# Altium PCB A5000_BasicBackplane.PcbDoc
Units mm, origin at the board's own origin, x right, y up, seen from the top; angles counter-clockwise.
Board outline 240.28 x 64.01 mm, 4 copper layers (Top Layer, 5V, Mixed Power, Bottom Layer), stack 1.741 mm thick; 10 components, 60 nets, 390 pads, 75 vias.
Unrouted connection lines stored in the file: 1.
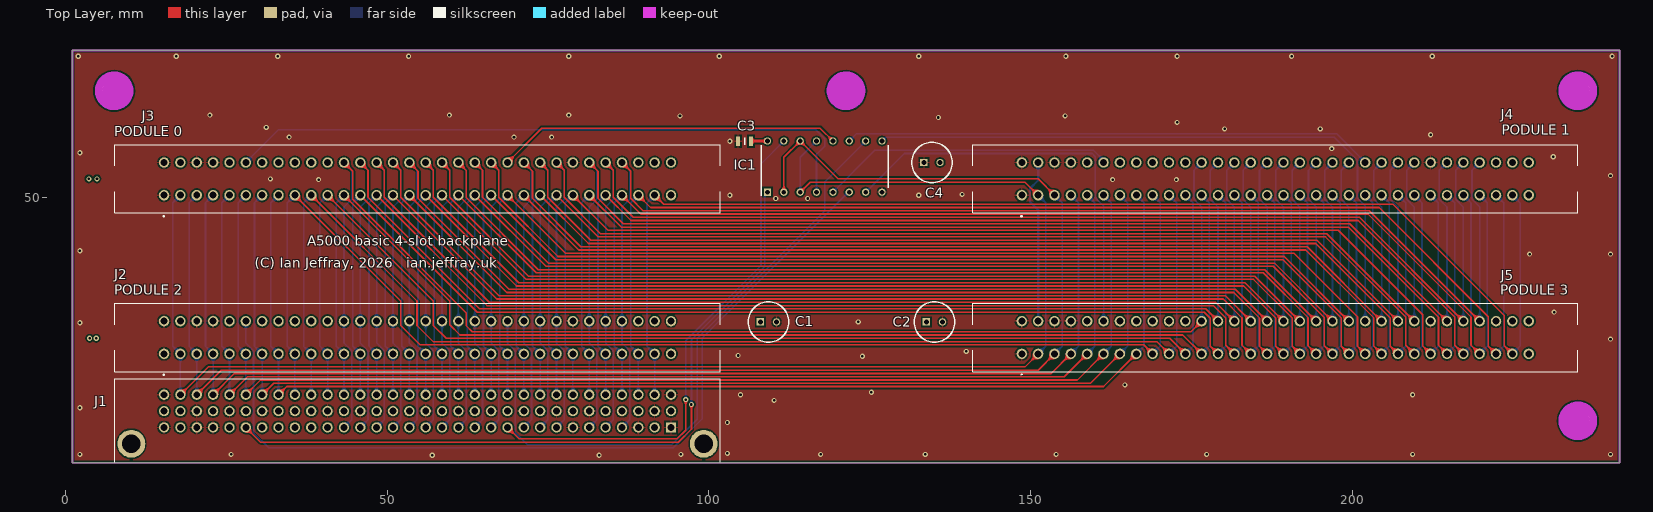
[diagram p0: Top Layer view]
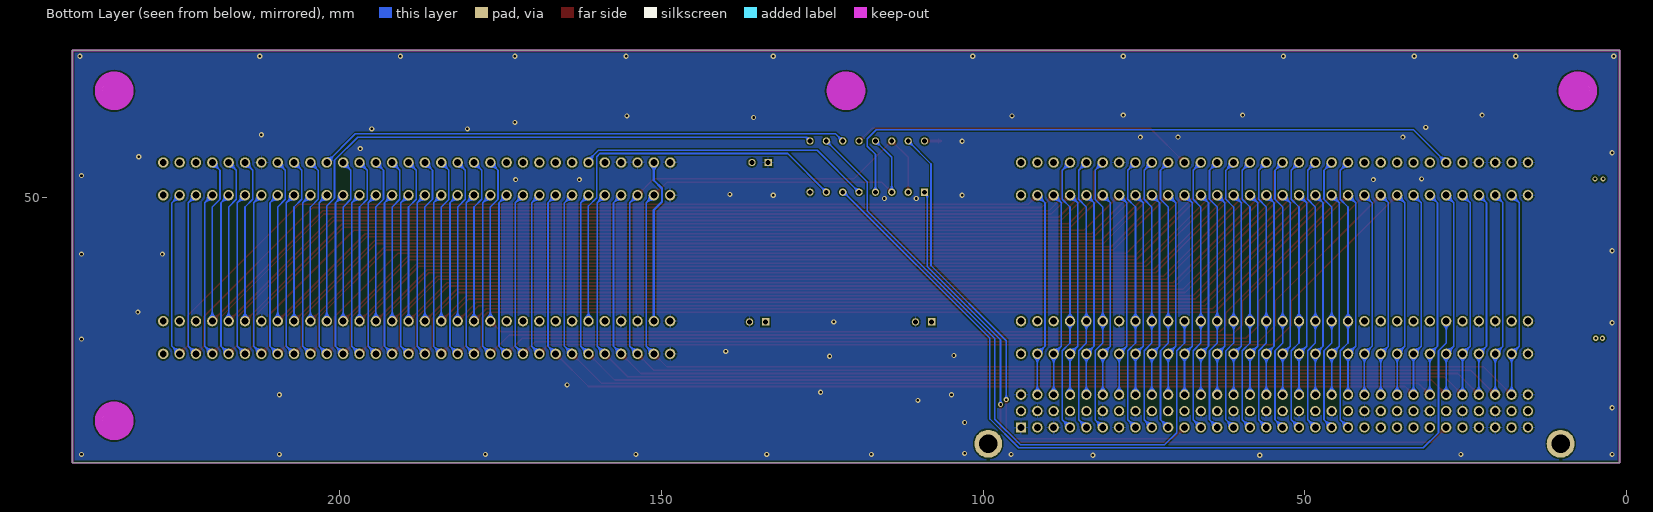
[diagram p1: Bottom Layer view, seen from below]
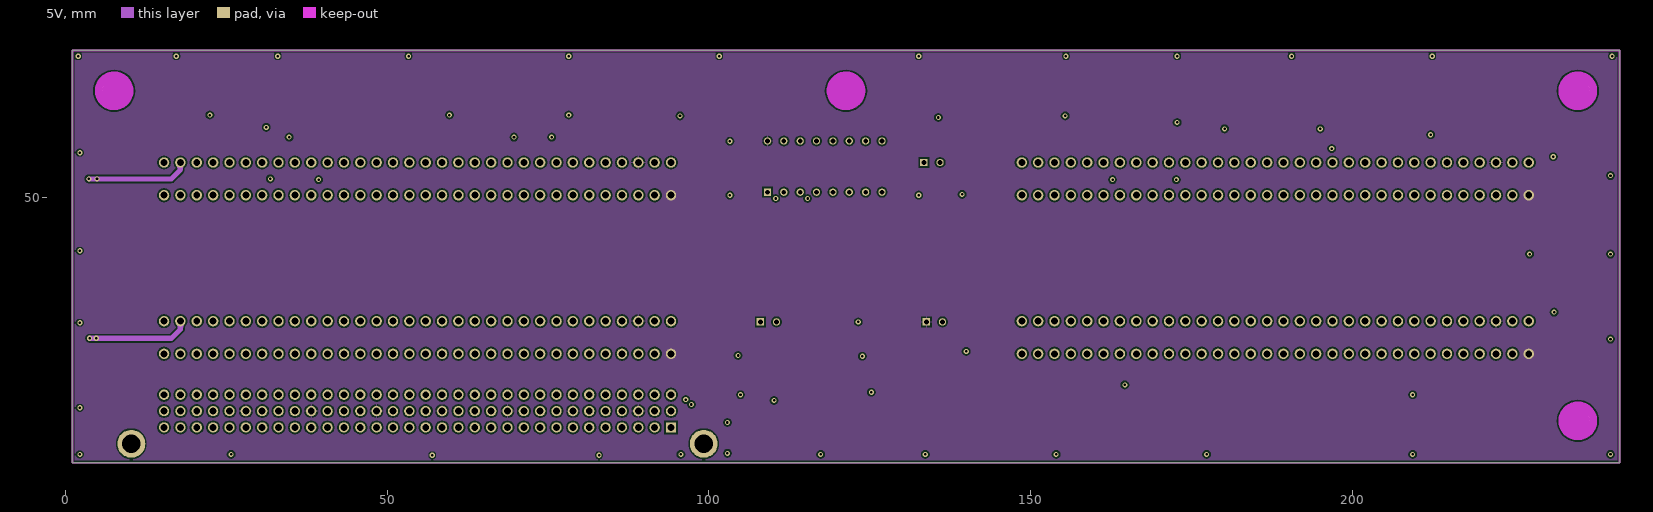
[diagram p2: 5V]
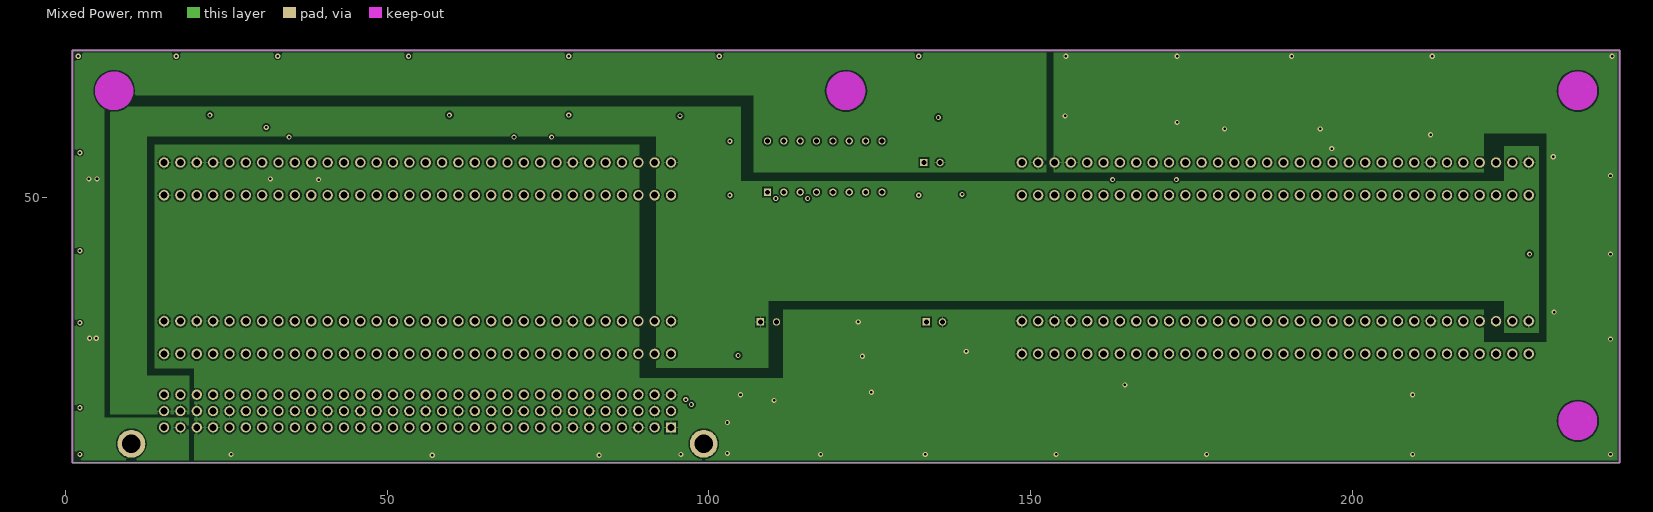
[diagram p3: Mixed Power]
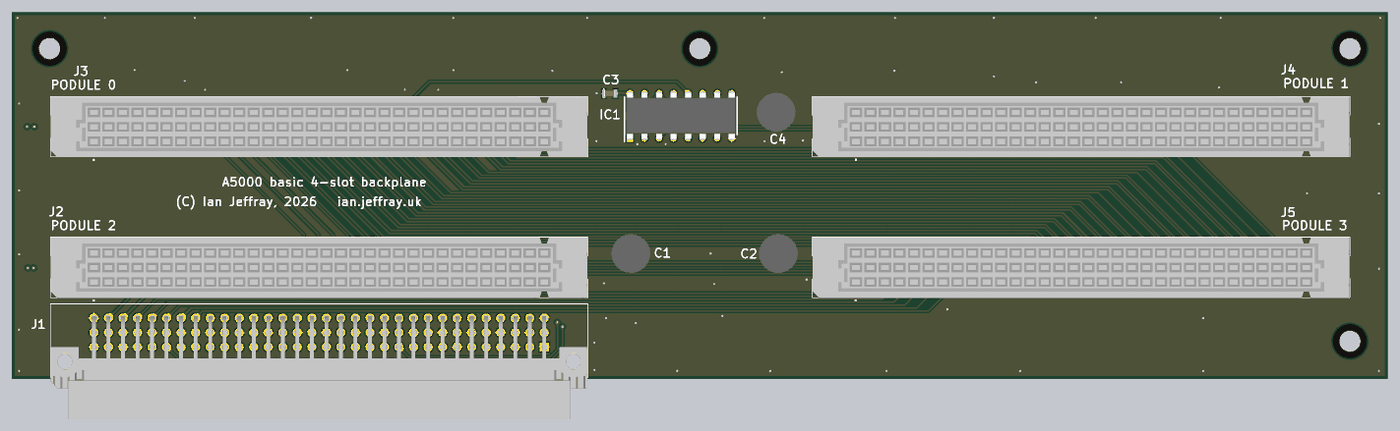
[diagram p4: 3D render of the assembled board from above, using the file's embedded part models]

## Layer stack, top to bottom
Top Solder: solder mask 0.0102, Solder Resist, Dk 3.5
Top Layer: signal copper 0.0356
Dielectric 1: dielectric 0.2, FR-4, Dk 4.8
5V: signal copper 0.035
Dielectric 2: core 1.2, PP-006, Dk 4.1
Mixed Power: signal copper 0.035
Dielectric2: dielectric 0.2, FR-4, Dk 4.8
Bottom Layer: signal copper 0.0356
Bottom Solder: solder mask 0.0102, Solder Resist, Dk 3.5

## Board outline
1.143,8.763 1.143,72.771 241.427,72.771 241.427,8.763

## Design rules (kind name [scope] priority, off if disabled: settings)
Clearance [All] p1: gap=0.254 ignorepadtopadclearanceinfootprint=FALSE except(0: Arc-Hole Track-Hole SMDPad-Hole THPad-Hole Via-Hole Fill-Hole Poly-Hole Region-Hole Text-Hole)
HoleSize [All] p1: absolutevalues=TRUE maxlimit=4 minlimit=0.025 maxpercent=80.000 minpercent=20.000
PolygonConnect [All] p1: connectstyle=Relief reliefconductorwidth=0.254 reliefentries=4 polygonreliefangle="90 Angle" airgapwidth=0.254
RoutingVias [All] p1: holewidth=0.711 width=1.27 viastyle="Through Hole" minholewidth=0.711 minwidth=1.27 maxholewidth=0.711 maxwidth=1.27
SolderMaskExpansion [All] p1: expansion=0.102 istentingtop=FALSE
SupplyNets "Schematic Supply Nets_4" [InNet('0V')] p1: voltage=0.000
SupplyNets "Schematic Supply Nets_3" [InNet('5V')] p2: voltage=0.000
SupplyNets "Schematic Supply Nets_1" [InNet('-5V')] p3: voltage=0.000
SupplyNets "Schematic Supply Nets" [InNet('12V')] p4: voltage=0.000
Width [All] p1: maxlimit=2 minlimit=0.254 preferedwidth=0.254
29 further rules are at their usual default settings.

## Components (designator, comment, footprint, x,y, rotation, side; value= is the part's Value field where it differs from the comment)
C1 "ECA1EHG101" CAPPRD250W55D630H1220 107.99,30.607 r0 top
C2 "ECA1EHG101" CAPPRD250W55D630H1220 133.771,30.607 r0 top
C3 "C2012X7R2A104K125AA" CAPC2012X145N 105.537,58.674 r0 top
C4 "ECA1EHG101" CAPPRD250W55D630H1220 133.39,55.372 r0 top
IC1 "SN74HC139N" DIP794W53P254L1930H508Q16N 117.983,54.737 r90 top locked
J1 "650947-5" 6509475 94.107,14.224 r0 top locked
J2 "5650956-5" 56509565 15.367,25.654 r180 top locked
J3 "5650956-5" 56509565 15.367,50.292 r180 top locked
J4 "5650956-5" 56509565 148.59,50.292 r180 top locked
J5 "5650956-5" 56509565 148.59,25.654 r180 top locked

## Footprints (in the part's own frame and the unit in brackets; to place one, negate y for a bottom-side part, rotate by r counter-clockwise, add the part's x,y. Pads: shape width x height; smd on the part's side, far side on the other; paste and mask are expansions set on the pad)
6509475 [mm]
  rect 1.605x1.605 hole 1.07: A1(0,0)
  round 1.605 hole 1.07: A2(-2.54,0) A3(-5.08,0) A4(-7.62,0) A5(-10.16,0) A6(-12.7,0) A7(-15.24,0) A8(-17.78,0) A9(-20.32,0) A10(-22.86,0) A11(-25.4,0) A12(-27.94,0) A13(-30.48,0) A14(-33.02,0) A15(-35.56,0) A16(-38.1,0) A17(-40.64,0) A18(-43.18,0) A19(-45.72,0) A20(-48.26,0) A21(-50.8,0) A22(-53.34,0) A23(-55.88,0) A24(-58.42,0) A25(-60.96,0) A26(-63.5,0) A27(-66.04,0) A28(-68.58,0) A29(-71.12,0) A30(-73.66,0) A31(-76.2,0) A32(-78.74,0) B1(0,2.54) B2(-2.54,2.54) B3(-5.08,2.54) B4(-7.62,2.54) B5(-10.16,2.54) B6(-12.7,2.54) B7(-15.24,2.54) B8(-17.78,2.54) B9(-20.32,2.54) B10(-22.86,2.54) B11(-25.4,2.54) B12(-27.94,2.54) B13(-30.48,2.54) B14(-33.02,2.54) B15(-35.56,2.54) B16(-38.1,2.54) B17(-40.64,2.54) B18(-43.18,2.54) B19(-45.72,2.54) B20(-48.26,2.54) B21(-50.8,2.54) B22(-53.34,2.54) B23(-55.88,2.54) B24(-58.42,2.54) B25(-60.96,2.54) B26(-63.5,2.54) B27(-66.04,2.54) B28(-68.58,2.54) B29(-71.12,2.54) B30(-73.66,2.54) B31(-76.2,2.54) B32(-78.74,2.54) C1(0,5.08) C2(-2.54,5.08) C3(-5.08,5.08) C4(-7.62,5.08) C5(-10.16,5.08) C6(-12.7,5.08) C7(-15.24,5.08) C8(-17.78,5.08) C9(-20.32,5.08) C10(-22.86,5.08) C11(-25.4,5.08) C12(-27.94,5.08) C13(-30.48,5.08) C14(-33.02,5.08) C15(-35.56,5.08) C16(-38.1,5.08) C17(-40.64,5.08) C18(-43.18,5.08) C19(-45.72,5.08) C20(-48.26,5.08) C21(-50.8,5.08) C22(-53.34,5.08) C23(-55.88,5.08) C24(-58.42,5.08) C25(-60.96,5.08) C26(-63.5,5.08) C27(-66.04,5.08) C28(-68.58,5.08) C29(-71.12,5.08) C30(-73.66,5.08) C31(-76.2,5.08) C32(-78.74,5.08)
  round 4.335 hole 2.89: MH1(5.08,-2.54) MH2(-83.82,-2.54)
  silkscreen extent -86.37,-5.41 7.63,7.56, body extent -86.29,-12.65 7.55,5.37, height 9.63
56509565 [mm]
  round 1.62 hole 1.08: A1(0,0) A2(-2.54,0) A3(-5.08,0) A4(-7.62,0) A5(-10.16,0) A6(-12.7,0) A7(-15.24,0) A8(-17.78,0) A9(-20.32,0) A10(-22.86,0) A11(-25.4,0) A12(-27.94,0) A13(-30.48,0) A14(-33.02,0) A15(-35.56,0) A16(-38.1,0) A17(-40.64,0) A18(-43.18,0) A19(-45.72,0) A20(-48.26,0) A21(-50.8,0) A22(-53.34,0) A23(-55.88,0) A24(-58.42,0) A25(-60.96,0) A26(-63.5,0) A27(-66.04,0) A28(-68.58,0) A29(-71.12,0) A30(-73.66,0) A31(-76.2,0) A32(-78.74,0) C1(0,-5.08) C2(-2.54,-5.08) C3(-5.08,-5.08) C4(-7.62,-5.08) C5(-10.16,-5.08) C6(-12.7,-5.08) C7(-15.24,-5.08) C8(-17.78,-5.08) C9(-20.32,-5.08) C10(-22.86,-5.08) C11(-25.4,-5.08) C12(-27.94,-5.08) C13(-30.48,-5.08) C14(-33.02,-5.08) C15(-35.56,-5.08) C16(-38.1,-5.08) C17(-40.64,-5.08) C18(-43.18,-5.08) C19(-45.72,-5.08) C20(-48.26,-5.08) C21(-50.8,-5.08) C22(-53.34,-5.08) C23(-55.88,-5.08) C24(-58.42,-5.08) C25(-60.96,-5.08) C26(-63.5,-5.08) C27(-66.04,-5.08) C28(-68.58,-5.08) C29(-71.12,-5.08) C30(-73.66,-5.08) C31(-76.2,-5.08) C32(-78.74,-5.08)
  round 4.335 on Mech16: MH1(-84.365,-2.54) MH2(5.625,-2.54)
  silkscreen extent -86.37,-7.84 7.62,3.36, body extent -86.3,-7.8 7.56,2.8, height 11.58
CAPC2012X145N [mm]
  rect 0.62x1.47 smd: 1(-1,0) 2(1,0)
  silkscreen extent 0,-0.53 0,0.53, body extent -1,-0.63 1,0.63, height 1.45
CAPPRD250W55D630H1220 [mm]
  rect 1.15x1.15 hole 0.75: 1(0,0)
  round 1.15 hole 0.75: 2(2.5,0)
  silkscreen extent -1.9,-3.15 4.4,3.15, body extent -2.15,-3.4 4.65,3.4, height 12.2
DIP794W53P254L1930H508Q16N [mm]
  rect 1.13x1.13 hole 0.73: 1(-3.97,8.89)
  round 1.13 hole 0.73: 2(-3.97,6.35) 3(-3.97,3.81) 4(-3.97,1.27) 5(-3.97,-1.27) 6(-3.97,-3.81) 7(-3.97,-6.35) 8(-3.97,-8.89) 9(3.97,-8.89) 10(3.97,-6.35) 11(3.97,-3.81) 12(3.97,-1.27) 13(3.97,1.27) 14(3.97,3.81) 15(3.97,6.35) 16(3.97,8.89)
  silkscreen extent -4.53,-9.84 3.3,9.84, body extent -4.1,-9.65 4.1,9.65, height 5.08

## Part data
C1 C2 C4: "Capacitor Polarised", Manufacturer_Name=Panasonic, Datasheet Link=http://industrial.panasonic.com/cdbs/www-data/pdf/RDF0000/ABA0000C1215.pdf, Height=12.2mm, Manufacturer_Part_Number=ECA1EHG101
C3: "Capacitor", Manufacturer_Name=TDK, Mouser Part Number=810-C2012X7R2A104K, Arrow Part Number=C2012X7R2A104K125AA, Arrow Price/Stock=https://www.arrow.com/en/products/c2012x7r2a104k125aa/tdk, Datasheet Link=https://product.tdk.com/info/en/catalog/datasheets/mlcc_commercial_midvoltage_en.pdf, Height=1.45mm, Manufacturer_Part_Number=C2012X7R2A104K125AA, Mouser Price/Stock=https://www.mouser.co.uk/ProductDetail/TDK/C2012X7R2A104K125AA?qs=NRhsANhppD9J0ZsT2%2Fo%2F7Q%3D%3D
IC1: "Integrated Circuit", Manufacturer_Name="Texas Instruments", Mouser Part Number=595-SN74HC139N, Arrow Part Number=SN74HC139N, Arrow Price/Stock=https://www.arrow.com/en/products/sn74hc139n/texas-instruments, Datasheet Link=http://www.ti.com/lit/gpn/sn74hc139, Height=5.08mm, Manufacturer_Part_Number=SN74HC139N, Mouser Price/Stock=https://www.mouser.co.uk/ProductDetail/Texas-Instruments/SN74HC139N/?qs=DcvZ7Fltd5wMzlxyLmVDxw%3D%3D
J1: "Connector", Manufacturer_Name="TE Connectivity", Mouser Part Number=571-6509475, Arrow Part Number=650947-5, Arrow Price/Stock=https://www.arrow.com/en/products/650947-5/te-connectivity, Datasheet Link=http://www.te.com/commerce/DocumentDelivery/DDEController?Action=srchrtrv&DocNm=650947&DocType=Customer+Drawing&DocLang=English, Height=11.1mm, Manufacturer_Part_Number=650947-5, Mouser Price/Stock=https://www.mouser.co.uk/ProductDetail/TE-Connectivity/650947-5?qs=A%252B%2FNCR0PvNW83cU5ePdpGw%3D%3D
J2 J3 J4 J5: "Connector", Manufacturer_Name="TE Connectivity", Mouser Part Number=571-5650956-5, Datasheet Link=https://componentsearchengine.com/Datasheets/2/5650956-5.pdf, Height=11.51mm, Manufacturer_Part_Number=5650956-5, Mouser Price/Stock=https://www.mouser.co.uk/ProductDetail/TE-Connectivity/5650956-5?qs=U4pz39agNJCw%2F9%252BN9Cdy%2Fg%3D%3D

## Free pads (board coordinates)
  round 3.71 hole 3.7 unplated mask+0.102: H1(7.62,66.5) H2(121.285,66.5) H3(234.95,66.5) H4(234.95,15.24)

## Via types
v1: diameter 0.8, hole 0.4, Top Layer to Bottom Layer, tented both sides, 75 vias

## Nets (pads, with @x,y where several pads share a name; then routed paths per layer and width w, separated by ;. In a path a pad name is that pad's centre, name@x,y a point inside that pad or via, vN(x,y) a via of type N, cw(c..) or ccw(c..) an arc to the next point about the centre after c; other vN are vias at no path point)
0V: C1.2 C2.2 C3.1 C4.1 IC1.8 J1.A1 J1.A3 J1.A7 J1.A29 J1.A30 J1.A32 J1.B2 J1.B4 J1.B6 J1.B8 J1.B10 J1.B12 J1.B14 J1.B16 J1.B18 J1.B20 J1.B22 J1.B24 J1.B26 J1.B28 J1.B30 J1.C1 J1.C32 J2.A1 J2.C1 J2.C3 J2.C4 J2.C26 J3.A1 J3.C1 J3.C3 J3.C4 J3.C26 J4.A1 J4.C1 J4.C3 J4.C4 J4.C26 J5.A1 J5.C1 J5.C3 J5.C4 J5.C26
  other v1: 57.023,9.906 82.931,9.906 2.286,10.033 25.781,10.033 95.631,10.033 117.348,10.033 133.604,10.033 153.924,10.033 177.292,10.033 209.296,10.033 240.03,10.033 102.87,10.197 102.87,14.986 2.286,17.272 110.109,18.415 104.902,19.304 209.296,19.304 125.222,19.685 164.592,20.828 123.825,25.273 104.521,25.4 139.954,26.035 240.03,27.94 2.286,30.48 123.19,30.607 231.267,32.131 227.457,41.148 240.03,41.148 2.286,41.656 110.363,49.784 115.316,49.784 103.251,50.292 132.588,50.292 139.319,50.419 39.37,52.705 162.687,52.705 172.593,52.705 31.877,52.832 240.03,53.34 231.14,56.261 2.286,56.896 196.723,57.531 103.251,58.674 34.798,59.309 69.723,59.309 75.565,59.309 212.09,59.69 180.086,60.598 194.945,60.598 31.242,60.833 172.72,61.595 135.636,62.357 95.504,62.611 155.321,62.611 22.479,62.738 59.69,62.738 78.232,62.738 2.032,71.882 17.272,71.882 33.02,71.882 53.34,71.882 78.232,71.882 101.6,71.882 132.588,71.882 155.448,71.882 172.72,71.882 190.5,71.882 212.344,71.882 240.284,71.882
5V: C2.1 C3.2 IC1.16 J1.B3 J1.B7 J1.B11 J1.B15 J1.B19 J1.B23 J1.B27 J2.A32 J2.C30 J3.A32 J3.C30 J4.A32 J4.C30 J5.A32 J5.C30 | length 2.6
  Top Layer w0.254: C3.2 C3.2@106.57,58.707
  Top Layer w0.4: C3.2@106.57,58.707 IC1.16
12V: C1.1 J1.B31 J1.B32 J2.C32 J3.C32 J4.C32 J5.C32
-5V: C4.2 J1.A31 J2.C2 J3.C2 J4.C2 J5.C2 | length 57.6
  5V w0.8: v1(3.683,52.832) v1(4.953,52.832) 16.51,52.832 17.857,54.179 17.857,55.322 J3.C2 ; v1(3.81,28.067) v1(4.826,28.067) 16.51,28.067 17.907,29.464 J2.C2
  Bottom Layer w0.35: J5.C2 151.13,48.006 149.86,49.276 149.86,51.327 151.13,52.597 J4.C2
/IOGT: J1.A10 J2.C23 J3.C23 J4.C23 J5.C23 | length 214.6
  Top Layer w0.254: J3.C23 72.596,54.023 72.596,49.799 80.104,42.291 192.913,42.291 J5.C23
  Bottom Layer w0.254: J1.A10 72.438,15.415 72.438,26.147 71.247,27.338 J2.C23 71.247,48.47 72.438,49.661 72.438,54.181 J3.C23 ; J5.C23 204.47,48.47 203.279,49.661 203.279,54.181 J4.C23
/IORQ: J1.A9 J2.C24 J3.C24 J4.C24 J5.C24 | length 214.6
  Top Layer w0.254: J3.C24 74.978,54.181 74.978,49.957 81.628,43.307 194.437,43.307 J5.C24
  Bottom Layer w0.254: J1.A9 74.978,15.415 74.978,26.147 73.787,27.338 J2.C24 73.787,48.47 74.978,49.661 74.978,54.181 J3.C24 ; J5.C24 207.01,48.47 205.819,49.661 205.819,54.181 J4.C24
/MS0: IC1.4 J3.C6 | length 101.4
  Bottom Layer w0.254: J3.C6 33.147,60.452 116.586,60.452 117.983,59.055 117.983,57.912 116.713,56.642 IC1.4
/MS1: IC1.5 J4.C6 | length 45.7
  Bottom Layer w0.254: IC1.5 125.763,57.277 159.722,57.277 161.29,55.709 J4.C6
/MS2: IC1.6 J2.C6 | length 135.1
  Bottom Layer w0.254: J2.C6 28.067,27.338 29.258,26.147 29.258,13.414 31.623,11.049 94.444,11.049 98.933,15.538 98.933,28.067 121.633,50.767 IC1.6
/MS3: IC1.7 J5.C6 | length 64.4
  Bottom Layer w0.254: IC1.7 130.335,56.769 159.512,56.769 160.016,56.265 160.016,49.881 161.29,48.608 J5.C6
/PFIQ: J1.A16 J2.C17 J3.C17 J4.C17 J5.C17 | length 214.6
  Top Layer w0.254: J3.C17 57.198,54.181 57.198,49.957 70.452,36.703 183.261,36.703 J5.C17
  Bottom Layer w0.254: J1.A16 57.198,15.415 57.198,26.147 56.007,27.338 J2.C17 56.007,48.47 57.198,49.661 57.198,54.181 J3.C17 ; J5.C17 189.23,48.47 188.039,49.661 188.039,54.181 J4.C17
/PIRQ: J1.A17 J2.C16 J3.C16 J4.C16 J5.C16 | length 214.6
  Top Layer w0.254: J3.C16 54.816,54.023 54.816,49.799 68.928,35.687 181.737,35.687 J5.C16
  Bottom Layer w0.254: J1.A17 54.658,15.415 54.658,26.147 53.467,27.338 J2.C16 53.467,48.47 54.658,49.661 54.658,54.181 J3.C16 ; J5.C16 186.69,48.47 185.499,49.661 185.499,54.181 J4.C16
/PRE: J1.A18 J2.C15 J3.C15 J4.C15 J5.C15 | length 214.6
  Top Layer w0.254: J3.C15 52.118,54.181 52.118,49.957 67.404,34.671 180.213,34.671 J5.C15
  Bottom Layer w0.254: J1.A18 52.118,15.415 52.118,26.147 50.927,27.338 J2.C15 50.927,48.47 52.118,49.661 52.118,54.181 J3.C15 ; J5.C15 184.15,48.47 182.959,49.661 182.959,54.181 J4.C15
/PS0: IC1.12 J3.C22 | length 53.6
  Top Layer w0.254: J3.C22 74.041,60.706 117.254,60.706 IC1.12
/PS1: IC1.11 J4.C22 | length 82.4
  Bottom Layer w0.254: IC1.11 122.903,59.817 197.485,59.817 J4.C22
/PS2: IC1.10 J2.C22 | length 102.5
  Bottom Layer w0.254: J2.C22 68.707,27.338 69.898,26.147 69.898,13.414 71.755,11.557 94.234,11.557 98.171,15.494 98.171,28.023 117.983,47.835 117.983,52.357 IC1.10
/PS3: IC1.9 J5.C22 | length 101.1
  Bottom Layer w0.254: IC1.9 127.475,59.309 197.137,59.309 200.739,55.707 200.739,49.799 201.93,48.608 J5.C22
/PWE: J1.A19 J2.C14 J3.C14 J4.C14 J5.C14 | length 214.6
  Top Layer w0.254: J3.C14 49.578,54.181 49.578,49.957 65.88,33.655 178.689,33.655 J5.C14
  Bottom Layer w0.254: J1.A19 49.578,15.415 49.578,26.147 48.387,27.338 J2.C14 48.387,48.47 49.578,49.661 49.578,54.181 J3.C14 ; J5.C14 181.61,48.47 180.419,49.661 180.419,54.181 J4.C14
/RST: J1.A21 J2.C12 J3.C12 J4.C12 J5.C12 | length 217.3
  Top Layer w0.254: J3.C12 44.656,54.023 44.656,49.661 62.278,32.039 62.278,30.051 63.246,29.083 174.879,29.083 J5.C12
  Bottom Layer w0.254: J1.A21 44.498,15.415 44.498,26.147 43.307,27.338 J2.C12 43.307,48.47 44.498,49.661 44.498,54.181 J3.C12 ; J5.C12 176.53,48.47 175.339,49.661 175.339,54.181 J4.C12
/S4: IC1.15 J1.A11 | length 80.2
  Top Layer w0.254: J1.A11 70.485,12.446 95.04,12.446 96.393,13.799 v1(96.393,18.542)
  Bottom Layer w0.254: v1(96.393,18.542) 96.393,27.686 108.077,39.37 108.077,55.151 IC1.15
/S6_UNIX: J1.A15 J2.C18 J3.C18 J4.C18 J5.C18 | length 214.6
  Top Layer w0.254: J3.C18 59.738,54.181 59.738,49.957 71.976,37.719 184.785,37.719 J5.C18
  Bottom Layer w0.254: J1.A15 59.738,15.415 59.738,26.147 58.547,27.338 J2.C18 58.547,48.47 59.738,49.661 59.738,54.181 J3.C18 ; J5.C18 191.77,48.47 190.579,49.661 190.579,54.181 J4.C18
/S7: J1.A12 J2.C21 J3.C21 J4.C21 J5.C21 | length 214.6
  Top Layer w0.254: J3.C21 67.358,54.181 67.358,49.957 76.548,40.767 189.357,40.767 J5.C21
  Bottom Layer w0.254: J1.A12 67.358,15.415 67.358,26.147 66.167,27.338 J2.C21 66.167,48.47 67.358,49.661 67.358,54.181 J3.C21 ; J5.C21 199.39,48.47 198.199,49.661 198.199,54.181 J4.C21
BD0: J1.C2 J2.A31 J3.A31 J4.A31 J5.A31 | length 203.8
  Top Layer w0.254: J3.A31 92.964,48.895 206.248,48.895 223.52,31.623 223.52,26.924 J5.A31
  Bottom Layer w0.254: J1.C2 J2.A31 90.376,26.845 90.376,49.101 J3.A31 ; J5.A31 225.981,26.845 225.981,49.101 J4.A31
BD1: J1.C3 J2.A30 J3.A30 J4.A30 J5.A30 | length 203.7
  Top Layer w0.254: J3.A30 90.932,48.387 204.089,48.387 221.059,31.417 221.059,26.845 J5.A30
  Bottom Layer w0.254: J1.C3 J2.A30 87.836,26.845 87.836,49.101 J3.A30 ; J5.A30 223.441,26.845 223.441,49.101 J4.A30
BD2: J1.C4 J2.A29 J3.A29 J4.A29 J5.A29 | length 203.6
  Top Layer w0.254: J3.A29 89.408,47.371 202.355,47.371 218.361,31.365 218.361,27.003 J5.A29
  Bottom Layer w0.254: J1.C4 J2.A29 85.296,26.845 85.296,49.101 J3.A29 ; J5.A29 220.901,26.845 220.901,49.101 J4.A29
BD3: J1.C5 J2.A28 J3.A28 J4.A28 J5.A28 | length 203.6
  Top Layer w0.254: J3.A28 87.884,46.355 200.831,46.355 215.821,31.365 215.821,27.003 J5.A28
  Bottom Layer w0.254: J1.C5 J2.A28 82.756,26.845 82.756,49.101 J3.A28 ; J5.A28 218.361,26.845 218.361,49.101 J4.A28
BD4: J1.C6 J2.A27 J3.A27 J4.A27 J5.A27 | length 203.6
  Top Layer w0.254: J3.A27 86.36,45.339 199.307,45.339 213.306,31.34 213.306,26.978 J5.A27
  Bottom Layer w0.254: J1.C6 J2.A27 80.216,26.845 80.216,49.101 J3.A27 ; J5.A27 215.821,26.845 215.821,49.101 J4.A27
BD5: J1.C7 J2.A26 J3.A26 J4.A26 J5.A26 | length 203.9
  Top Layer w0.254: J3.A26 84.328,44.831 197.739,44.831 210.867,31.703 210.867,26.877 J5.A26
  Bottom Layer w0.254: J1.C7 J2.A26 77.676,26.845 77.676,49.101 J3.A26 ; J5.A26 213.281,26.845 213.281,49.101 J4.A26
BD6: J1.C8 J2.A25 J3.A25 J4.A25 J5.A25 | length 203.6
  Top Layer w0.254: J3.A25 82.804,43.815 195.751,43.815 208.201,31.365 208.201,27.003 J5.A25
  Bottom Layer w0.254: J1.C8 J2.A25 75.136,26.845 75.136,49.101 J3.A25 ; J5.A25 210.741,26.845 210.741,49.101 J4.A25
BD7: J1.C9 J2.A24 J3.A24 J4.A24 J5.A24 | length 203.6
  Top Layer w0.254: J3.A24 81.28,42.799 194.227,42.799 205.819,31.207 205.819,26.845 J5.A24
  Bottom Layer w0.254: J1.C9 J2.A24 72.596,26.845 72.596,49.101 J3.A24 ; J5.A24 208.201,26.845 208.201,49.101 J4.A24
BD8: J1.C10 J2.A23 J3.A23 J4.A23 J5.A23 | length 203.6
  Top Layer w0.254: J3.A23 79.756,41.783 192.703,41.783 203.279,31.207 203.279,26.845 J5.A23
  Bottom Layer w0.254: J1.C10 J2.A23 70.056,26.845 70.056,49.101 J3.A23 ; J5.A23 205.661,26.845 205.661,49.101 J4.A23
BD9: J1.C11 J2.A22 J3.A22 J4.A22 J5.A22 | length 203.7
  Top Layer w0.254: J3.A22 77.724,41.275 190.881,41.275 200.739,31.417 200.739,26.845 J5.A22
  Bottom Layer w0.254: J1.C11 J2.A22 67.516,26.845 67.516,49.101 J3.A22 ; J5.A22 203.121,26.845 203.121,49.101 J4.A22
BD10: J1.C12 J2.A21 J3.A21 J4.A21 J5.A21 | length 203.6
  Top Layer w0.254: J3.A21 76.2,40.259 189.147,40.259 198.199,31.207 198.199,26.845 J5.A21
  Bottom Layer w0.254: J1.C12 J2.A21 64.976,26.845 64.976,49.101 J3.A21 ; J5.A21 200.581,26.845 200.581,49.101 J4.A21
BD11: J1.C13 J2.A20 J3.A20 J4.A20 J5.A20 | length 203.6
  Top Layer w0.254: J3.A20 74.676,39.243 187.623,39.243 195.58,31.286 195.58,26.924 J5.A20
  Bottom Layer w0.254: J1.C13 J2.A20 62.436,26.845 62.436,49.101 J3.A20 ; J5.A20 198.041,26.845 198.041,49.101 J4.A20
BD12: J1.C14 J2.A19 J3.A19 J4.A19 J5.A19 | length 203.6
  Top Layer w0.254: J3.A19 73.152,38.227 186.099,38.227 193.04,31.286 193.04,26.924 J5.A19
  Bottom Layer w0.254: J1.C14 J2.A19 59.896,26.845 59.896,49.101 J3.A19 ; J5.A19 195.501,26.845 195.501,49.101 J4.A19
BD13: J1.C15 J2.A18 J3.A18 J4.A18 J5.A18 | length 203.6
  Top Layer w0.254: J3.A18 71.628,37.211 184.575,37.211 190.579,31.207 190.579,26.845 J5.A18
  Bottom Layer w0.254: J1.C15 J2.A18 57.356,26.845 57.356,49.101 J3.A18 ; J5.A18 192.961,26.845 192.961,49.101 J4.A18
BD14: J1.C16 J2.A17 J3.A17 J4.A17 J5.A17 | length 203.6
  Top Layer w0.254: J3.A17 70.104,36.195 183.051,36.195 188.039,31.207 188.039,26.845 J5.A17
  Bottom Layer w0.254: J1.C16 J2.A17 54.816,26.845 54.816,49.101 J3.A17 ; J5.A17 190.421,26.845 190.421,49.101 J4.A17
BD15: J1.C17 J2.A16 J3.A16 J4.A16 J5.A16 | length 203.6
  Top Layer w0.254: J3.A16 68.58,35.179 181.527,35.179 185.499,31.207 185.499,26.845 J5.A16
  Bottom Layer w0.254: J1.C17 J2.A16 52.276,26.845 52.276,49.101 J3.A16 ; J5.A16 187.881,26.845 187.881,49.101 J4.A16
BL: J1.A8 J2.C25 J3.C25 J4.C25 J5.C25 | length 214.6
  Top Layer w0.254: J3.C25 77.518,54.181 77.518,49.957 83.152,44.323 195.961,44.323 J5.C25
  Bottom Layer w0.254: J1.A8 77.518,15.415 77.518,26.147 76.327,27.338 J2.C25 76.327,48.47 77.518,49.661 77.518,54.181 J3.C25 ; J5.C25 209.55,48.47 208.359,49.661 208.359,54.181 J4.C25
C0: J1.A13 J2.C20 J3.C20 J4.C20 J5.C20 | length 214.6
  Top Layer w0.254: J3.C20 64.818,54.181 64.818,49.957 75.024,39.751 187.833,39.751 J5.C20
  Bottom Layer w0.254: J1.A13 64.818,15.415 64.818,26.147 63.627,27.338 J2.C20 63.627,48.47 64.818,49.661 64.818,54.181 J3.C20 ; J5.C20 196.85,48.47 195.659,49.661 195.659,54.181 J4.C20
C1: J1.A14 J2.C19 J3.C19 J4.C19 J5.C19 | length 214.6
  Top Layer w0.254: J3.C19 62.278,54.181 62.278,49.957 73.5,38.735 186.309,38.735 J5.C19
  Bottom Layer w0.254: J1.A14 62.278,15.415 62.278,26.147 61.087,27.338 J2.C19 61.087,48.47 62.278,49.661 62.278,54.181 J3.C19 ; J5.C19 194.31,48.47 193.119,49.661 193.119,54.181 J4.C19
CLK2: J1.A6 J2.C27 J3.C27 J4.C27 J5.C27 | length 214.6
  Top Layer w0.254: J3.C27 82.756,54.023 82.756,49.799 86.708,45.847 199.517,45.847 J5.C27
  Bottom Layer w0.254: J1.A6 82.598,15.415 82.598,26.147 81.407,27.338 J2.C27 81.407,48.47 82.598,49.661 82.598,54.181 J3.C27 ; J5.C27 214.63,48.47 213.439,49.661 213.439,54.181 J4.C27
CLK8: J1.A5 J2.C28 J3.C28 J4.C28 J5.C28 | length 214.6
  Top Layer w0.254: J3.C28 85.138,54.181 85.138,49.957 88.232,46.863 201.041,46.863 J5.C28
  Bottom Layer w0.254: J1.A5 85.138,15.415 85.138,26.147 83.947,27.338 J2.C28 83.947,48.47 85.138,49.661 85.138,54.181 J3.C28 ; J5.C28 217.17,48.47 215.979,49.661 215.979,54.181 J4.C28
LA2: J1.C18 J2.A15 J3.A15 J4.A15 J5.A15 | length 203.5
  Top Layer w0.254: J3.A15 67.056,34.163 179.865,34.163 182.801,31.227 182.801,27.003 J5.A15
  Bottom Layer w0.254: J1.C18 J2.A15 49.736,26.845 49.736,49.101 J3.A15 ; J5.A15 185.341,26.845 185.341,49.101 J4.A15
LA3: J1.C19 J2.A14 J3.A14 J4.A14 J5.A14 | length 203.5
  Top Layer w0.254: J3.A14 65.532,33.147 178.341,33.147 180.261,31.227 180.261,27.003 J5.A14
  Bottom Layer w0.254: J1.C19 J2.A14 47.196,26.845 47.196,49.101 J3.A14 ; J5.A14 182.801,26.845 182.801,49.101 J4.A14
LA4: J1.C20 J2.A13 J3.A13 J4.A13 J5.A13 | length 203.6
  Top Layer w0.254: J3.A13 64.008,32.131 176.911,32.131 177.879,31.163 177.879,26.845 J5.A13
  Bottom Layer w0.254: J1.C20 J2.A13 44.656,26.845 44.656,49.101 J3.A13 ; J5.A13 180.261,26.845 180.261,49.101 J4.A13
LA5: J1.C21 J2.A12 J3.A12 J4.A12 J5.A12 | length 203.2
  Top Layer w0.254: J3.A12 59.738,33.861 59.738,30.178 61.341,28.575 173.609,28.575 J5.A12
  Bottom Layer w0.254: J1.C21 J2.A12 42.116,26.845 42.116,49.101 J3.A12 ; J5.A12 177.721,26.845 177.721,49.101 J4.A12
LA6: J1.C22 J2.A11 J3.A11 J4.A11 J5.A11 | length 203.3
  Top Layer w0.254: J3.A11 57.198,33.861 57.198,30.051 59.182,28.067 171.577,28.067 J5.A11
  Bottom Layer w0.254: J1.C22 J2.A11 39.576,26.845 39.576,49.101 J3.A11 ; J5.A11 175.181,26.845 175.181,49.101 J4.A11
LA7: J1.C23 J2.A10 J3.A10 J4.A10 J5.A10 | length 203.3
  Top Layer w0.254: J3.A10 54.658,33.861 54.658,30.051 57.15,27.559 169.545,27.559 J5.A10
  Bottom Layer w0.254: J1.C23 J2.A10 37.036,26.845 37.036,49.101 J3.A10 ; J5.A10 172.641,26.845 172.641,49.101 J4.A10
LA8: J1.C24 J2.A9 J3.A9 J4.A9 J5.A9 | length 203.3
  Top Layer w0.254: J3.A9 52.118,33.861 52.118,30.051 55.118,27.051 167.513,27.051 J5.A9
  Bottom Layer w0.254: J1.C24 J2.A9 34.496,26.845 34.496,49.101 J3.A9 ; J5.A9 170.101,26.845 170.101,49.101 J4.A9
LA9: J1.C25 J2.A8 J3.A8 J4.A8 J5.A8 | length 193.5
  Top Layer w0.254: J1.C25 34.417,20.574 161.29,20.574 J5.A8
  Bottom Layer w0.254: J1.C25 J2.A8 31.956,26.845 31.956,49.101 J3.A8 ; J5.A8 167.561,26.845 167.561,49.101 J4.A8
LA10: J1.C26 J2.A7 J3.A7 J4.A7 J5.A7 | length 193.5
  Top Layer w0.254: J1.C26 32.385,21.082 159.258,21.082 J5.A7
  Bottom Layer w0.254: J1.C26 J2.A7 29.416,26.845 29.416,49.101 J3.A7 ; J5.A7 165.021,26.845 165.021,49.101 J4.A7
LA11: J1.C27 J2.A6 J3.A6 J4.A6 J5.A6 | length 193.5
  Top Layer w0.254: J1.C27 30.353,21.59 157.226,21.59 J5.A6
  Bottom Layer w0.254: J1.C27 J2.A6 26.876,26.845 26.876,49.101 J3.A6 ; J5.A6 162.481,26.845 162.481,49.101 J4.A6
LA12: J1.C28 J2.A5 J3.A5 J4.A5 J5.A5 | length 193.5
  Top Layer w0.254: J1.C28 28.321,22.098 155.194,22.098 J5.A5
  Bottom Layer w0.254: J1.C28 J2.A5 24.336,26.845 24.336,49.101 J3.A5 ; J5.A5 159.941,26.845 159.941,49.101 J4.A5
LA13: J1.C29 J2.A4 J3.A4 J4.A4 J5.A4 | length 193.5
  Top Layer w0.254: J1.C29 26.289,22.606 153.162,22.606 J5.A4
  Bottom Layer w0.254: J1.C29 J2.A4 21.796,26.845 21.796,49.101 J3.A4 ; J5.A4 157.401,26.845 157.401,49.101 J4.A4
LA14: IC1.2 IC1.14 J1.C30 J2.A3 J3.A3 J4.A3 J5.A3 | length 245.4
  Top Layer w0.254: J1.C30 24.257,23.114 151.13,23.114 J5.A3 ; IC1.2 111.633,56.167 IC1.14 120.048,52.832 151.13,52.832 J4.A3
  Bottom Layer w0.254: J1.C30 J2.A3 19.256,26.845 19.256,49.101 J3.A3 ; J5.A3 154.861,26.845 154.861,49.101 J4.A3
LA15: IC1.3 IC1.13 J1.C31 J2.A2 J3.A2 J4.A2 J5.A2 | length 240.9
  Top Layer w0.254: J1.C31 22.225,23.622 149.098,23.622 J5.A2 ; IC1.3 115.73,52.324 149.098,52.324 J4.A2
  Bottom Layer w0.254: J1.C31 J2.A2 16.716,26.845 16.716,49.101 J3.A2 ; IC1.3 114.173,56.167 IC1.13 ; J5.A2 152.321,26.845 152.321,49.101 J4.A2
LA21: IC1.1 J1.A27 | length 112.7
  Top Layer w0.254: J1.A27 30.353,11.938 95.25,11.938 97.282,13.97 v1(97.282,17.78)
  Bottom Layer w0.254: v1(97.282,17.78) 97.282,27.857 108.655,39.23 108.655,50.329 IC1.1
PR/W: J1.A20 J2.C13 J3.C13 J4.C13 J5.C13 | length 214.6
  Top Layer w0.254: J3.C13 47.038,54.181 47.038,49.957 64.356,32.639 177.165,32.639 J5.C13
  Bottom Layer w0.254: J1.A20 47.038,15.415 47.038,26.147 45.847,27.338 J2.C13 45.847,48.47 47.038,49.661 47.038,54.181 J3.C13 ; J5.C13 179.07,48.47 177.879,49.661 177.879,54.181 J4.C13
REF8M: J1.A4 J2.C29 J3.C29 J4.C29 J5.C29 | length 214.6
  Top Layer w0.254: J3.C29 87.836,54.023 87.836,49.799 89.756,47.879 202.565,47.879 J5.C29
  Bottom Layer w0.254: J1.A4 87.678,15.415 87.678,26.147 86.487,27.338 J2.C29 86.487,48.47 87.678,49.661 87.678,54.181 J3.C29 ; J5.C29 219.71,48.47 218.519,49.661 218.519,54.181 J4.C29
pads on no net: J1.A2 J1.A22 J1.A23 J1.A24 J1.A25 J1.A26 J1.A28 J1.B1 J1.B5 J1.B9 J1.B13 J1.B17 J1.B21 J1.B25 J1.B29 J1.MH1 J1.MH2 J2.C5 J2.C7 J2.C8 J2.C9 J2.C10 J2.C11 J2.C31 J2.MH1 J2.MH2 J3.C5 J3.C7 J3.C8 J3.C9 J3.C10 J3.C11 J3.C31 J3.MH1 J3.MH2 J4.C5 J4.C7 J4.C8 J4.C9 J4.C10 J4.C11 J4.C31 J4.MH1 J4.MH2 J5.C5 J5.C7 J5.C8 J5.C9 J5.C10 J5.C11 J5.C31 J5.MH1 J5.MH2

## Polygon pours and split planes (outlines as drawn)
-5V on Mixed Power "Mixed Power--5V" (solid, pour order 31): 106.934,53.848 152.4,53.848 152.4,72.771 1.143,72.771 1.143,8.763 19.177,8.763 19.177,15.748 6.096,15.748 6.096,65.786 106.934,65.786
12V on Mixed Power "Mixed Power-12V" (solid, pour order 32): 223.52,28.956 228.854,28.956 228.854,57.912 223.52,57.912 223.52,52.451 104.902,52.451 104.902,64.008 6.985,64.008 6.985,16.256 19.304,16.256 19.304,22.225 12.7,22.225 12.7,59.436 91.821,59.436 91.821,23.495 109.22,23.495 109.22,33.909 223.52,33.909
0V on Mixed Power "Mixed Power-0V" (solid, pour order 25): 20.066,8.763 241.427,8.763 241.427,72.771 153.543,72.771 153.543,53.848 220.345,53.848 220.345,59.944 230.124,59.944 230.124,27.432 220.345,27.432 220.345,32.512 111.506,32.512 111.506,21.844 89.154,21.844 89.154,58.166 13.918,58.166 13.918,23.423 20.066,23.423
0V on Top Layer "0V_L01_P000" (solid, remove dead copper, pour order 0): 1.143,72.771 241.427,72.771 241.427,8.763 1.143,8.763
5V on 5V "5V_L02_P002" (solid, pour order 2): 1.143,72.771 241.427,72.771 241.427,8.763 1.143,8.763
0V on Bottom Layer "0V_L04_P001" (solid, remove dead copper, pour order 1): 1.143,72.771 241.427,72.771 241.427,8.763 1.143,8.763

## Keep-outs
Keep-Out Layer:
  circle w3: c7.62,66.5 r1.5
  circle w3: c121.285,66.5 r1.5
  circle w3: c234.95,15.24 r1.5
  circle w3: c234.95,66.5 r1.5
  lines w0.254: 1.143,8.763 1.143,72.771 241.427,72.771 241.427,8.763 1.143,8.763

## Silkscreen, mask and mechanical layers (free items; w line width, h text height)
Top Overlay:
  text "PODULE 1" at 223.139,59.69 h1.52
  text "PODULE 0" at 7.62,59.436 h1.52
  text "A5000 basic 4-slot backplane" at 37.592,42.418 h1.52
  text "(C) Ian Jeffray, 2026   ian.jeffray.uk" at 29.464,38.989 h1.52
  text "PODULE 2" at 7.62,34.798 h1.52
  text "PODULE 3" at 222.885,34.798 h1.52
Top Solder:
  circle w3: c234.95,15.24 r1.5
  circle w3: c234.95,66.5 r1.5
  circle w3: c121.285,66.5 r1.5
  circle w3: c7.62,66.5 r1.5
Bottom Solder:
  circle w3: c234.95,15.192 r1.5
  circle w3: c234.95,66.452 r1.5
  circle w3: c121.285,66.452 r1.5
  circle w3: c7.62,66.452 r1.5
Board Shape:
  the board outline again, w0.254